# Altium PCB SFarm.PcbDoc (part 2 of 2)
Units mm, origin at the board's own origin, x right, y up, seen from the top; angles counter-clockwise.
Board outline 143 x 80 mm, 2 copper layers (Top Layer, Bottom Layer), stack 1.571 mm thick; 89 components, 71 nets, 378 pads, 342 vias.
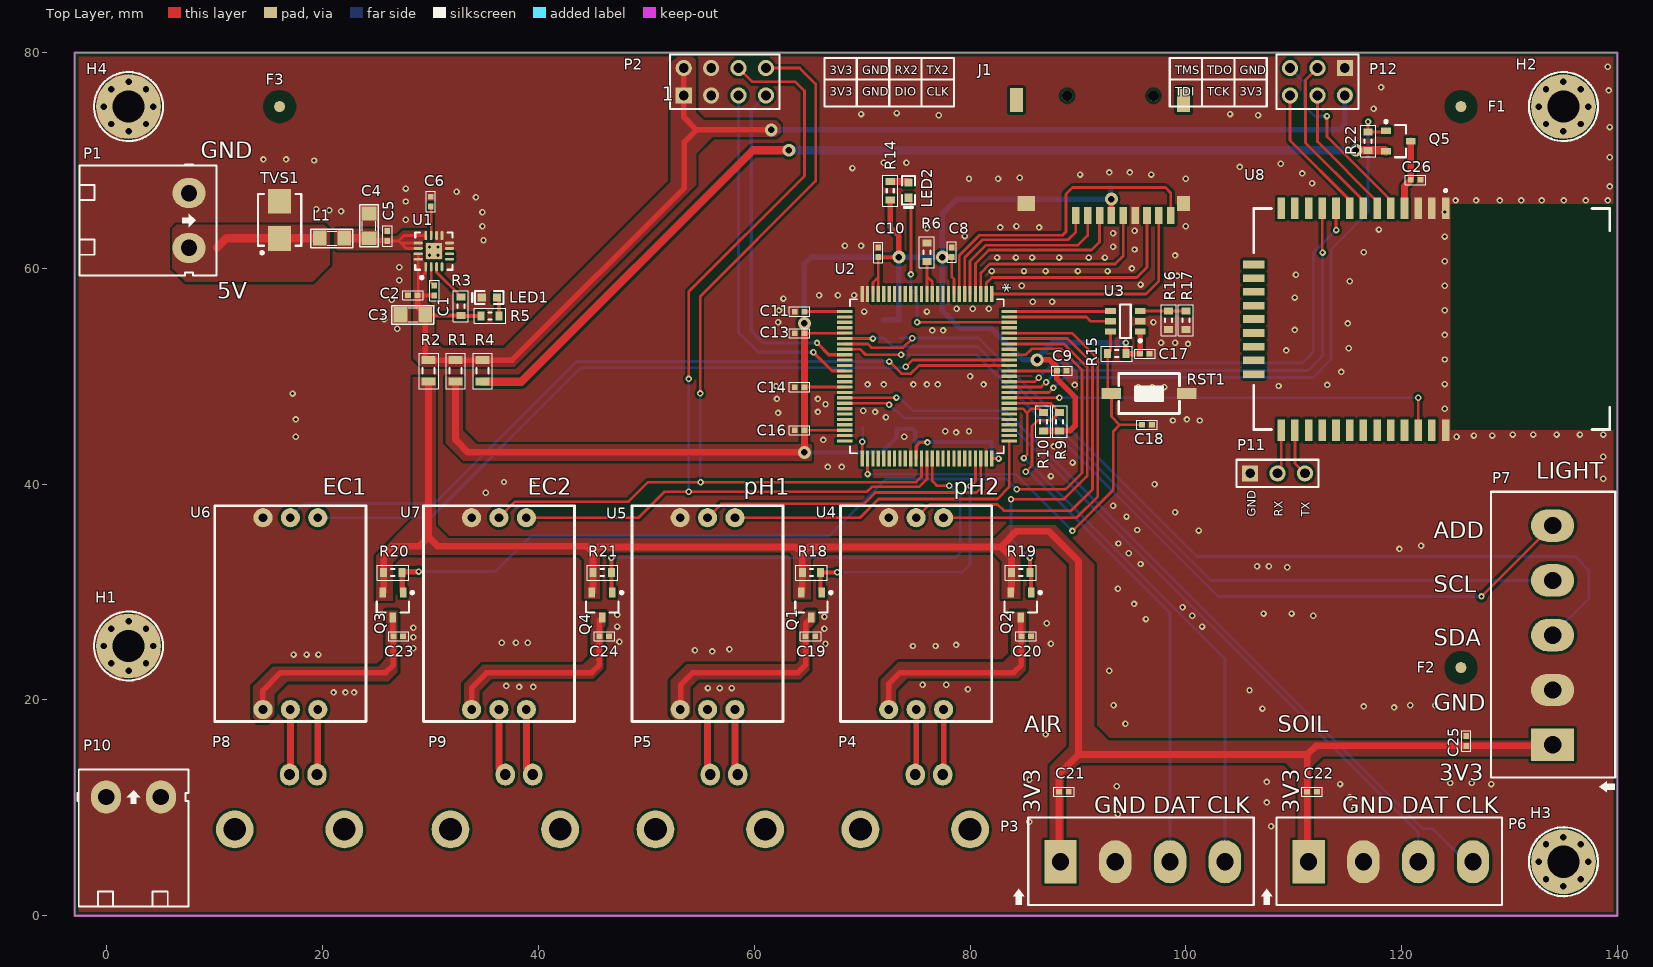
[diagram p0: Top Layer view]

## Via types
v1: diameter 0.6, hole 0.3, Top Layer to Bottom Layer, tented both sides, 301 vias
v2: diameter 1.2, hole 0.6, Top Layer to Bottom Layer, tented both sides, 41 vias

## Nets (pads, with @x,y where several pads share a name; then routed paths per layer and width w, separated by ;. In a path a pad name is that pad's centre, name@x,y a point inside that pad or via, vN(x,y) a via of type N, cw(c..) or ccw(c..) an arc to the next point about the centre after c; other vN are vias at no path point) (continued)
TX_EC2: (continued)
  Top Layer w0.254: U7.5 37.823,38.379 48.336,38.379 50.14,40.183 v1(55.016,40.183) 74.992,40.183 75.5,40.691 U2.62 ; v1(54.991,48.412) 54.991,57.404 65.684,68.097 65.684,77.089 64.203,78.57 P2.8
  Bottom Layer w0.254: v1(54.991,48.412) 54.991,40.208 v1(55.016,40.183)
TX_PH: U2.73 U5.5 | length 29.2
  Top Layer w0.254: U5.5 56.953,38.176 70.18,38.176 71.222,39.218 80.594,39.218 81,39.623 U2.73
TX_PH2: U2.95 U4.5 | length 38.3
  Top Layer w0.254: U4.5 76.235,38.125 82.55,38.125 83.134,37.541 89.383,37.541 91.338,39.497 91.338,51.181 89.019,53.5 U2.95
WAKE: U2.99 U3.5 | length 9.6
  Top Layer w0.254: U2.99 90.779,55.5 91.179,55.1 U3.5
pads on no net: F1. F2. F3. F4. F5. F6. H2. H3. J1.0 J1.12 J1.13 P4.3 P5.3 P8.3 P9.3 U1.4 U1.5 U1.6 U2.10 U2.11 U2.14 U2.15 U2.16 U2.17 U2.18 U2.19 U2.20 U2.21 U2.27 U2.28 U2.29 U2.35 U2.36 U2.38 U2.39 U2.44 U2.45 U2.46 U2.47 U2.50 U2.53 U2.54 U2.55 U2.56 U2.57 U2.58 U2.59 U2.65 U2.66 U2.67 U2.68 U2.69 U2.70 U2.71 U2.77 U2.78 U2.79 U2.80 U2.81 U2.93 U2.97 U8.11 U8.12 U8.13 U8.14 U8.15 U8.16 U8.17 U8.18 U8.19 U8.20 U8.21 U8.22 U8.25 U8.26 U8.27 U8.28 U8.29 U8.30 U8.31 U8.32 U8.34
copper on no net:
  other v2: 135,2.714 133.384,3.384 136.616,3.384 132.714,5 137.286,5 133.384,6.616 136.616,6.616 135,7.286 2,22.714 0.384,23.384 3.616,23.384 -0.286,25 4.286,25 0.384,26.616 3.616,26.616 2,27.286 2,72.714 135,72.714 0.384,73.384 3.616,73.384 133.384,73.384 136.616,73.384 -0.286,75 4.286,75 132.714,75 137.286,75 0.384,76.616 3.616,76.616 133.384,76.616 136.616,76.616 2,77.286 135,77.286

## Polygon pours and split planes (outlines as drawn)
GND on Top Layer "GND_L01_P020" (solid, remove dead copper, pour order 20): -3,80 140,80 140,39 20,39 20,51.5 -3,51.5
GND on Top Layer "GND_L01_P018" (solid, remove dead copper, pour order 18): -3,52 20,52 20,39 140,39 140,0 -3,0
P3V3_MCU on Top Layer "P3V3_MCU_L01_P016" (solid, remove dead copper, pour order 16): 31.394,49.936 31.394,43.815 33.045,42.164 65.303,42.164 65.303,43.688 34.29,43.688 32.995,44.983 32.995,49.936
NetC20_2 on Top Layer "NETC20_2_L01_P014" (solid, remove dead copper, pour order 14): 85.166,28.194 85.166,22.758 84.43,22.022 74.193,22.022 73.101,20.93 73.101,19.025 72.72,18.644 72.212,18.644 71.73,19.126 71.73,21.869 73.355,23.495 83.058,23.495 83.795,24.232 83.795,28.194
NetC19_2 on Top Layer "NETC19_2_L01_P012" (solid, remove dead copper, pour order 12): 53.492,18.161 54.051,18.72 54.051,21.158 54.813,21.92 64.237,21.92 65.126,22.809 65.1,22.835 65.1,26.619 65.71,27.229 65.71,28.27 64.821,28.27 64.16,27.61 64.16,23.622 63.83,23.292 53.721,23.292 52.248,21.819 52.248,18.567 52.654,18.161
NetC24_2 on Top Layer "NETC24_2_L01_P010" (solid, remove dead copper, pour order 10): 46.203,28.143 46.203,26.899 45.999,26.695 45.999,26.645 45.999,22.885 45.085,21.971 35.687,21.971 34.519,20.803 34.519,18.745 34.138,18.364 33.477,18.364 33.096,18.745 33.096,21.514 34.823,23.241 44.094,23.241 44.831,23.978 44.831,28.143
NetC23_2 on Top Layer "NETC23_2_L01_P008" (solid, remove dead copper, pour order 8): 14.859,17.958 15.519,18.618 15.519,20.523 16.713,21.717 26.06,21.717 26.924,22.581 26.924,28.27 25.857,28.27 25.857,23.825 25.121,23.089 15.342,23.089 13.538,21.285 13.538,18.339 13.919,17.958
P3V3_SS on Top Layer "P3V3_SS_L01_P006" (solid, remove dead copper, pour order 6): 28.346,49.911 28.346,36.779 24.943,33.376 24.943,29.21 26.492,29.21 26.492,32.715 27.229,33.452 43.764,33.452 44.221,32.995 44.221,29.362 45.695,29.362 45.695,33.274 46.101,33.68 63.221,33.68 63.627,33.274 63.627,29.312 65.227,29.312 65.227,33.045 65.862,33.68 82.118,33.68 82.956,32.842 82.956,29.388 84.658,29.388 84.658,33.655 85.293,34.29 87.452,34.29 89.179,32.563 89.179,15.646 87.401,13.868 87.401,6.858 88.671,6.858 88.697,6.883 88.697,12.675 90.195,14.173 109.195,14.173 110.388,12.979 110.388,6.782 111.531,6.782 111.633,6.883 111.633,13.741 112.674,14.783 134.976,14.783 134.976,16.205 135.001,16.231 92.837,16.231 91.516,17.551 91.516,32.588 87.909,36.195 83.541,36.195 82.321,34.976 31.623,34.976 30.455,36.144 30.455,49.911
P3V3 on Top Layer "P3V3_L01_P004" (solid, remove dead copper, pour order 4): 28.397,61.519 28.397,51.689 29.185,50.902 37.77,50.902 54.61,67.742 54.61,70.637 56.159,72.187 62.027,72.187 62.433,72.593 62.433,73.33 62.027,73.736 55.321,73.736 54.585,74.473 54.585,79.324 54.229,79.68 52.883,79.68 52.248,79.045 52.248,68.021 36.83,52.603 31.115,52.603 30.328,53.391 30.328,56.21 29.693,56.845 29.693,60.503 29.261,60.935 29.261,61.519
NetC4_2 on Top Layer "NETC4_2_L01_P002" (solid, remove dead copper, pour order 2): 21.387,61.697 21.057,62.027 21.057,63.424 21.285,63.652 24.867,63.652 25.552,62.967 26.873,62.967 27.407,63.5 29.667,63.5 29.743,63.424 29.743,62.713 29.667,62.636 29.362,62.636 29.261,62.535 29.261,61.747 29.21,61.697
P5V0 on Top Layer "P5V0_L01_P000" (solid, remove dead copper, pour order 0): 20.142,64.033 20.65,63.525 20.65,60.325 19.075,58.75 7.315,58.75 6.071,59.995 6.071,63.652 6.452,64.033
GND on Bottom Layer "GND_L02_P026" (solid, remove dead copper, pour order 26): 0,80 140,80 140,39 20,39 20,51.5 0,51.5
GND on Bottom Layer "GND_L02_P024" (solid, remove dead copper, pour order 24): 0,50 18.5,50 18.5,38 140,38 140,0 0,0

## Keep-outs
Keep-Out Layer:
  the board outline again, w0.203

## Other copper
Top Layer:
  pour cut-out: 140,45 140,66 124.5,66 124.5,45
  pour cut-out: 140,45 140,65.5
Bottom Layer:
  pour cut-out: 140,45 140,66 124.5,66 124.5,45

## Silkscreen, mask and mechanical layers (free items; w line width, h text height)
Top Overlay:
  lines w0.203: 66.5,77.5 78.5,77.5 ; 69.5,75 69.5,79.5 ; 72.5,75 72.5,79.5 ; 75.5,75 75.5,79.5 ; 98.5,77.5 107.5,77.5 ; 101.5,75 101.5,79.5 ; 104.5,75 104.5,79.5 ; 66.5,75 78.5,75 78.5,79.5 66.5,79.5 66.5,75 ; 98.5,75 98.5,79.5 107.5,79.5 107.5,75 98.5,75
  text "3V3" at 67,78 h0.76
  text "GND" at 70,78 h0.76
  text "RX2" at 73,78 h0.76
  text "TX2" at 76,78 h0.76
  text "TMS" at 99,78 h0.76
  text "TDO" at 102,78 h0.76
  text "GND" at 105,78 h0.76
  text "3V3" at 67,76 h0.76
  text "GND" at 70,76 h0.76
  text "DIO" at 73,76 h0.76
  text "CLK" at 76,76 h0.76
  text "TDI" at 99,76 h0.76
  text "TCK" at 102,76 h0.76
  text "3V3" at 105,76 h0.76
  text "GND" at 8.7,70.2 h1.52
  text "5V" at 10.224,57.2 h1.52
  text "LIGHT" at 132.5,40.5 h1.52
  text "EC1" at 20,39 h1.52
  text "EC2" at 39,39 h1.52
  text "pH1" at 59,39 h1.52
  text "pH2" at 78.5,39 h1.52
  text "GND" at 106.5,37 h0.76 r90
  text "RX" at 109,37 h0.76 r90
  text "TX" at 111.5,37 h0.76 r90
  text "ADD" at 123,35 h1.52
  text "SCL" at 123,30 h1.52
  text "SDA" at 123,25 h1.52
  text "GND" at 123,19 h1.52
  text "AIR" at 85,17 h1.52
  text "SOIL" at 108.5,17 h1.52
  text "3V3" at 123.5,12.5 h1.52
  text "3V3" at 86.5,9.5 h1.52 r90
  text "GND" at 91.5,9.5 h1.52
  text "DAT" at 97,9.5 h1.52
  text "CLK" at 102,9.5 h1.52
  text "3V3" at 110.5,9.5 h1.52 r90
  text "GND" at 114.5,9.5 h1.52
  text "DAT" at 120,9.5 h1.52
  text "CLK" at 125,9.5 h1.52

## Text inside footprints (layer, text, board x,y; h text height)
P2: Top Overlay "1" at 51.428,75.522 h1.27
U2: Top Overlay "*" at 82.477,58.636 h1.27 r270